# EAGLE board shield (EAGLE 7.7.0)
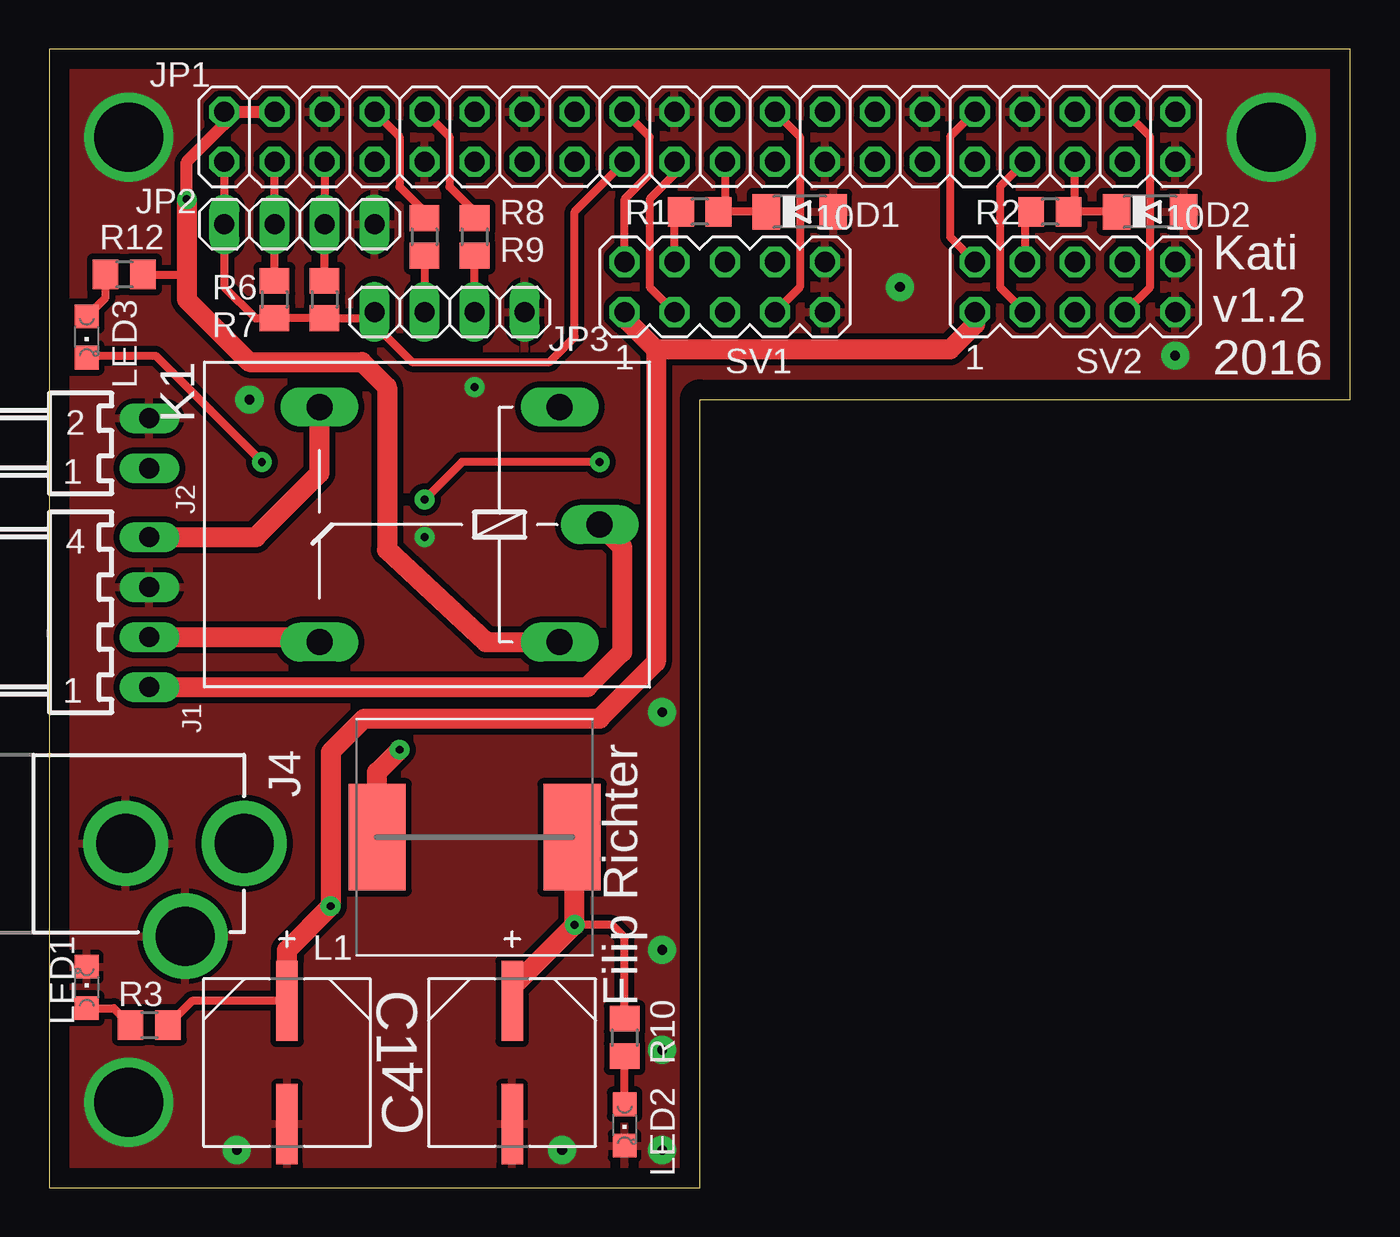
[diagram p0: board, top side]
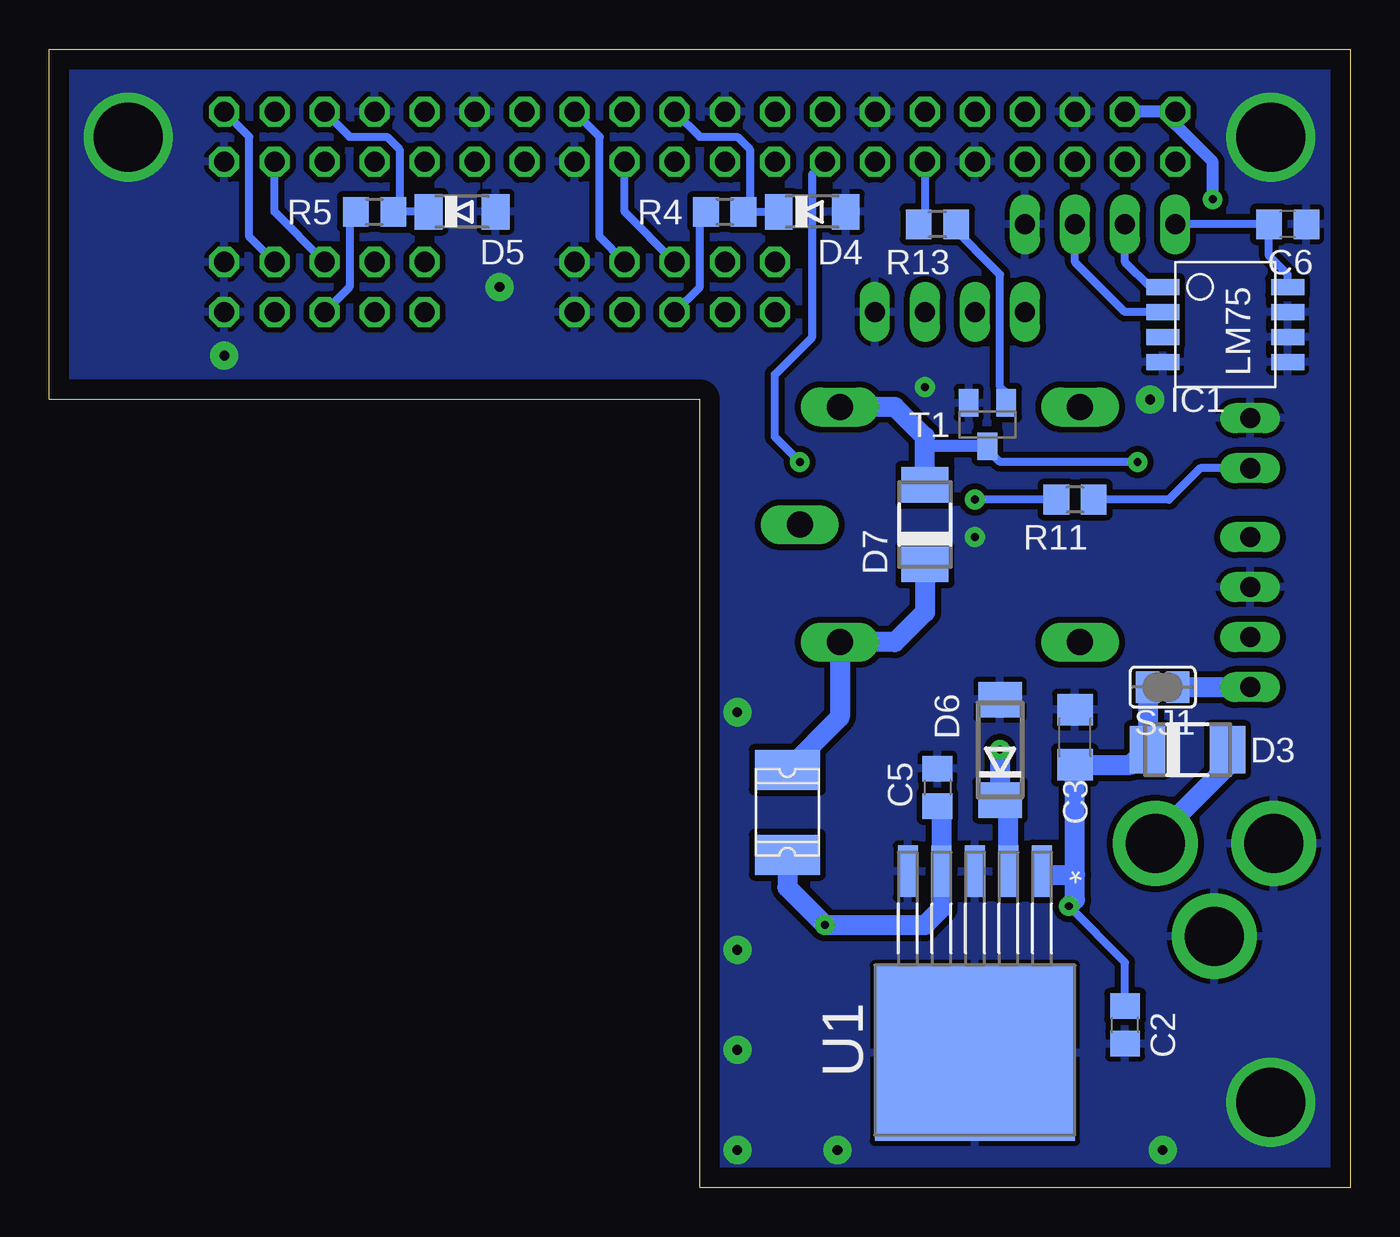
[diagram p1: board, bottom side, seen from below]

Size 66.04 x 57.78 mm. Coordinates in mm from the lower left corner, seen from the top.
Outline: 0,0 33.02,0 33.02,40.01 66.04,40.01 66.04,57.78 0,57.78 0,0
Copper layers (1*16): Top 0.018mm / dielectric 1.5mm / Bottom 0.018mm
Design rules "Pragoboard *": minimum track width 0.15mm, minimum drill 0.3mm, track to track 0.15mm, track to pad 0.15mm, pad to pad 0.15mm, via to via 0.15mm, smd to smd 0.15mm, copper to edge 40mil, drill to drill 8mil, minimum pad ring 10mil, minimum via ring 8mil, stop-mask expansion 4mil, vias tented up to drill 0.5mm, thermal gap 10mil

## Footprints (pad centres in the part's own frame; a part is rotated, then mirrored left to right if it is on the bottom)
CAPAE830X1050N = smd 4.064 x 1.092: 1 -3.124,0; 2 3.124,0
C0805 = smd 1.3 x 1.5: 1 -0.95,0; 2 0.95,0
C1206 = smd 1.6 x 1.8: 1 -1.4,0; 2 1.4,0
MINIMELF = smd 1.4 x 1.8: A 1.7,0; C -1.7,0
DO-214AC = smd 1.8 x 2.4: A 2.025,0; C -2.025,0
DO214AA = smd 1.8 x 2.2: A 2.55,0; C -2.55,0
1812L = smd 2.03 x 3.3: P$1 -2.16,0; P$2 2.16,0
SO8_LM75 = smd 0.813 x 1.676: 1 -1.27,-3.175; 2 0,-3.175; 3 1.27,-3.175; 4 2.54,-3.175; 5 2.54,3.175; 6 1.27,3.175; 7 0,3.175; 8 -1.27,3.175
7395-04 = drill 1.016 long: 1 3.81,0; 2 1.27,0; 3 -1.27,0; 4 -3.81,0
7395-02 = drill 1.016 long: 1 1.27,0; 2 -1.27,0
POWER_JACK_PTH = drill 2.997 pad 4.318: GND 0,7.7; GNDBREAK 4.7,10.7; PWR 0,13.7
2X20 = drill 1.016 octagon: 1 -24.13,-1.27; 2 -24.13,1.27; 3 -21.59,-1.27; 4 -21.59,1.27; 5 -19.05,-1.27; 6 -19.05,1.27; 7 -16.51,-1.27; 8 -16.51,1.27; 9 -13.97,-1.27; 10 -13.97,1.27; 11 -11.43,-1.27; 12 -11.43,1.27; 13 -8.89,-1.27; 14 -8.89,1.27; 15 -6.35,-1.27; 16 -6.35,1.27; 17 -3.81,-1.27; 18 -3.81,1.27; 19 -1.27,-1.27; 20 -1.27,1.27; 21 1.27,-1.27; 22 1.27,1.27; 23 3.81,-1.27; 24 3.81,1.27; 25 6.35,-1.27; 26 6.35,1.27; 27 8.89,-1.27; 28 8.89,1.27; 29 11.43,-1.27; 30 11.43,1.27; 31 13.97,-1.27; 32 13.97,1.27; 33 16.51,-1.27; 34 16.51,1.27; 35 19.05,-1.27; 36 19.05,1.27; 37 21.59,-1.27; 38 21.59,1.27; 39 24.13,-1.27; 40 24.13,1.27
1X04 = drill 1.016 long: 1 -3.81,0; 2 -1.27,0; 3 1.27,0; 4 3.81,0
G5LE = drill 1.321 long: 1 -7.493,-5.969; 2 -7.493,5.969; O 4.699,5.969; P -9.525,0; S 4.699,-5.969
WE-PD_1260/1245/1280/1210 = smd 2.9 x 5.4: 1 -4.95,0; 2 4.95,0
CHIPLED_0805 = smd 1.2 x 1.2: A 0,-1.05; C 0,1.05
R0805 = smd 1.3 x 1.5: 1 -0.95,0; 2 0.95,0
SJ = smd 1.168 x 1.6: 1 -0.762,0; 2 0.762,0
MA05-2 = drill 1.016 octagon: 1 -5.08,-1.27; 2 -5.08,1.27; 3 -2.54,-1.27; 4 -2.54,1.27; 5 0,-1.27; 6 0,1.27; 7 2.54,-1.27; 8 2.54,1.27; 9 5.08,-1.27; 10 5.08,1.27
SOT23-BEC = smd 1 x 1.4: B -0.95,-1.1; C 0,1.1; E 0.95,-1.1
TO170P1435X465-6N = smd 1.016 x 2.616: 1 -3.404,-9.068; 2 -1.702,-9.068; 3 0,-9.068; 4 1.702,-9.068; 5 3.404,-9.068 | smd 10.16 x 8.941: 6 0,0.152

## Placement (x,y rotation side)
C1  220UF  [CAPAE830X1050N]  12.06,6.35 270 top
C2  100n  [C0805]  11.43,8.26 90 bottom
C3  2.2uF/100V  [C1206]  13.97,22.86 90 bottom
C4  220u  [CAPAE830X1050N]  23.5,6.35 270 top
C5  100n  [C0805]  20.95,20.32 270 bottom
C6  100n  [C0805]  3.17,48.9 180 bottom
D1  BZV55C3.0SMD  [MINIMELF]  38.1,49.53 0 top
D2  BZV55C3.0SMD  [MINIMELF]  55.88,49.53 0 top
D3  1N4007 DO-214AC  [DO-214AC]  8.26,22.23 0 bottom
D4  BZV55C3.0SMD  [MINIMELF]  27.3,49.53 0 bottom
D5  BZV55C3.0SMD  [MINIMELF]  45.09,49.53 0 bottom
D6  SSB44-E3/52T  [DO214AA]  17.78,22.23 90 bottom
D7  1N4007 DO-214AC  [DO-214AC]  21.59,33.66 90 bottom
F1  PPTC1812SMD110/16V  [1812L]  28.57,19.05 90 bottom
IC1  LM75  [SO8_LM75]  6.35,44.45 270 bottom
J1  22-05-7048-04  [7395-04]  5.08,29.21 270 top
J2  22-05-7028-02  [7395-02]  5.08,37.78 270 top
J4  POWER_JACKPTH  [POWER_JACK_PTH]  -3.81,17.46 270 top
JP1  BL840GD  [2X20]  33.02,53.34 0 top
JP2  S1G04 2,54mm  [1X04]  12.7,48.9 0 top
JP3  S1G04 2,54mm  [1X04]  20.32,44.45 0 top
K1  G5L  [G5LE]  18.41,33.66 180 top
L1  SRR1260-680M  [WE-PD_1260/1245/1280/1210]  21.59,17.78 0 top
LED1  SML-LXT0805IW-TR  [CHIPLED_0805]  1.91,10.16 0 top
LED2  SML-LX0805SUGC-TR  [CHIPLED_0805]  29.21,3.17 180 top
LED3  SML-LX0805SUGC-TR  [CHIPLED_0805]  1.91,43.18 180 top
R1  1k7  [R0805]  33.02,49.53 180 top
R2  1k7  [R0805]  50.8,49.53 180 top
R3  5K6  [R0805]  5.08,8.26 0 top
R4  1k7  [R0805]  31.75,49.53 0 bottom
R5  1k7  [R0805]  49.53,49.53 0 bottom
R6  4k7  [R0805]  11.43,45.09 270 top
R7  4k7  [R0805]  13.97,45.09 270 top
R8  120R  [R0805]  19.05,48.26 270 top
R9  120R  [R0805]  21.59,48.26 270 top
R10  560R  [R0805]  29.21,7.62 270 top
R11  1k  [R0805]  13.97,34.92 180 bottom
R12  560R  [R0805]  3.81,46.35 180 top
R13  860R  [R0805]  20.95,48.9 180 bottom
SJ1  [SJ]  9.53,25.4 180 bottom
SV1  S2G10  [MA05-2]  34.29,45.72 0 top
SV2  S2G10  [MA05-2]  52.07,45.72 0 top
T1  BC817  [SOT23-BEC]  18.41,38.73 180 bottom
U1  LM2596S-5.0  [TO170P1435X465-6N]  19.05,6.99 180 bottom

## Library data of the parts
C1 C4 = Panasonic-EEEFK_EEEFP; MPN: EEE-FP1V221AP; OC_FARNELL: 1539514; OC_NEWARK: 94M7043; PACKAGE: CASE-F; SUPPLIER: PANASONIC; TOLERANCE: ±20 %; VOLTAGERATING: 35V
C2 C3 C5 C6 R1-R13 = rcl
D1-D7 = diode
F1 = ptc-littlefuse
IC1 = lm75
J1 = con-molex; OC_FARNELL: unknown; OC_NEWARK: unknown
J2 = con-molex; OC_FARNELL: 9731601; OC_NEWARK: unknown
J4 = SparkFun-Connectors; PROD_ID: CONN-08197
JP1-JP3 = pinhead
K1 = relay; OC_FARNELL: unknown; OC_NEWARK: unknown
L1 = WE-PD; MPN: 7447709680; OC_FARNELL: 1635947; OC_NEWARK: 08P2779; PACKAGE: 1210; SUPPLIER: Wuerth Elektronik
LED1-LED3 = led
SJ1 = jumper
SV1 SV2 = con-lstb; OC_FARNELL: unknown; OC_NEWARK: unknown
T1 = transistor
U1 = mylib; MPN: LM2596S-50; OC_FARNELL: 1214546; OC_NEWARK: 41K3844; PACKAGE: TO-263-5; SUPPLIER: National

## Nets
+3V3: C6.2 IC1.8 JP1.1 JP1.17 JP2.1 JP3.1 R6.2 R7.2
+5V: D7.C F1.P$2 JP1.2 JP1.4 K1.2 R12.1
+24V: C1.1 C2.2 C3.1 D3.C R3.2 SJ1.2 SV1.1 SV2.1 U1.1
C: J1.1 K1.P SJ1.1
GND: C1.2 C2.1 C3.2 C4.2 C5.1 C6.1 D1.A D2.A D4.A D5.A D6.A IC1.4 IC1.5 IC1.6 IC1.7 J1.3 J2.2 J4.GND J4.GNDBREAK JP1.6 JP1.9 JP1.14 JP1.20 JP1.25 JP1.30 JP1.34 JP1.39 JP2.4 JP3.4 LED1.C LED2.C SV1.9 SV1.10 SV2.9 SV2.10 T1.E U1.3 U1.5 U1.6
I-BEEP: JP1.18 SV1.2
I-D0: R1.2 SV1.4
I-D0-3V3: D1.C JP1.21 R1.1
I-D1: R4.1 SV1.5
I-D1-3V3: D4.C JP1.22 R4.2
I-GLED: JP1.23 SV1.6
I-HOLD: JP1.19 SV1.3
I-RLED: JP1.24 SV1.7
I-TMP: JP1.26 SV1.8
LED: LED3.A R12.2
LOCK: JP1.11 R13.2
LOCK_T1_R: R13.1 T1.B
N$1: C4.1 C5.2 F1.P$1 L1.2 R10.1 U1.4
N$2: J2.1 R11.1
N$3: JP3.2 R8.2
N$4: LED2.A R10.2
N$6: JP3.3 R9.2
N$23: LED1.A R3.1
N$31: D6.C L1.1 U1.2
NC: J1.2 K1.O
NO: J1.4 K1.S
O-BEEP: JP1.32 SV2.2
O-D0: R2.2 SV2.4
O-D0-3V3: D2.C JP1.35 R2.1
O-D1: R5.1 SV2.5
O-D1-3V3: D5.C JP1.36 R5.2
O-GLED: JP1.37 SV2.6
O-HOLD: JP1.33 SV2.3
O-RLED: JP1.38 SV2.7
O-TMP: JP1.40 SV2.8
RELAY_SW: D7.A K1.1 LED3.C T1.C
RXD: JP1.10 R9.1
SCL: IC1.2 JP1.5 JP2.3 R7.1
SDA: IC1.1 JP1.3 JP2.2 R6.1
TAMPER: JP1.15 R11.2
TXD: JP1.8 R8.1
UIN: D3.A J4.PWR

## Tracks (layer width: path | path; a pad name or v marks a point on that pad's centre or on a via)
+3V3
  Top 0.406: JP1.1 JP2.1 8.89,45.72 10.47,44.13 R6.2 R7.2 16.2,44.13 JP3.1 16.51,43.81 18.41,41.91 25.4,41.91 26.67,43.18 26.67,49.53 JP1.17
  Bottom 0.406: JP2.1 C6.2 4.12,47.3 3.17,46.35 IC1.8
+5V  (via drill 0.4 pad 1)
  Top 0.406: R12.1 6.99,46.35
  Top 0.61: v6.99,50.16 6.99,52.07 8.89,53.98 JP1.2 JP1.4
  Top 1.016: v6.99,50.16 6.99,46.35 6.99,45.09 10.16,41.91 15.88,41.91 17.14,40.64 17.14,32.38 22.16,27.69 K1.2
  Bottom 0.61: v6.99,50.16 6.99,52.07 8.89,53.98 JP1.2 JP1.4
  Bottom 1.016: D7.C 21.59,29.21 23.11,27.69 K1.2 25.91,23.88 F1.P$2
+24V  (via drill 0.4 pad 1)
  Top 0.406: C1.1 7.25,9.47 R3.2
  Top 1.016: 12.06,8.89 C1.1 12.06,12.06 v14.29,14.29 14.29,22.11 15.99,23.81 27.94,23.81 30.8,26.67 30.8,42.55 | 30.8,42.55 29.21,44.13 SV1.1 | SV2.1 46.99,43.81 45.72,42.55 30.8,42.55
  Bottom 0.406: C2.2 11.43,11.43 v14.29,14.29 | 10.36,22.23 D3.C
  Bottom 1.016: v14.29,14.29 13.97,14.61 13.97,15.88 | 13.97,15.88 C3.1 11.12,21.46 10.36,22.23 | U1.1 15.65,15.88 13.97,15.88 | SJ1.2 D3.C
C
  Top 1.016: J1.1 27.3,25.4 29.08,27.18 29.08,32.51 K1.P
  Bottom 1.016: SJ1.1 J1.1
GND  (via drill 0.4 pad 1, 0.5 pad 1.42, 3.5)
  other vias: 31.11,12.06 9.53,1.91 26.04,1.91 31.11,1.91 31.11,6.99 31.11,24.13 19.05,33.02 21.59,40.64 57.15,42.23 43.18,45.72 10.16,40.01 4.03,4.33 4.03,53.33 62.03,53.33
  pour Top (isolate 0.305): 0,57.78 66.04,57.78 66.04,40.01 33.02,40.01 33.02,0 0,0
  pour Bottom (isolate 0.305): 0,57.78 66.04,57.78 66.04,40.01 33.02,40.01 33.02,0 0,0
I-BEEP
  Top 0.406: SV1.2 29.21,50.16 30.48,51.44 30.48,53.34 JP1.18
I-D0
  Top 0.406: SV1.4 31.75,49.21 R1.2
I-D0-3V3
  Top 0.406: JP1.21 34.29,49.85 R1.1 D1.C
I-D1
  Bottom 0.406: SV1.5 33.02,45.72 33.02,49.22 R4.1
I-D1-3V3
  Bottom 0.406: JP1.22 33.02,53.34 31.11,53.34 30.48,52.7 30.48,49.84 R4.2 D4.C
I-GLED
  Bottom 0.406: SV1.6 36.83,49.53 JP1.23
I-HOLD
  Top 0.406: JP1.19 31.75,51.44 30.48,50.16 30.48,45.72 SV1.3
I-RLED
  Top 0.406: JP1.24 38.1,53.34 38.1,45.72 SV1.7
I-TMP
  Bottom 0.406: SV1.8 38.1,48.26 38.1,53.34 JP1.26
LED
  Top 0.406: LED3.A 2.86,45.19 R12.2
LOCK
  Bottom 0.406: JP1.11 21.59,49.21 R13.2
LOCK_T1_R
  Bottom 0.406: T1.B 17.46,40.33 17.78,40.64 17.78,46.35 20.32,48.9 R13.1
N$1  (via drill 0.4 pad 1)
  Top 0.406: R10.1 29.21,12.7 28.57,13.34 v26.67,13.34
  Top 1.016: C4.1 23.5,10.16 v26.67,13.34 26.67,17.65 L1.2
  Bottom 1.016: C5.2 20.75,19.37 U1.4 20.75,14.17 21.59,13.34 v26.67,13.34 28.57,15.24 F1.P$1
N$2
  Bottom 0.406: J2.1 7.62,36.51 9.21,34.92 R11.1
N$3
  Top 0.406: R8.2 JP3.2
N$4
  Top 0.406: LED2.A R10.2
N$6
  Top 0.406: JP3.3 R9.2
N$23
  Top 0.406: LED1.A 3.27,9.11 R3.1
N$31  (via drill 0.4 pad 1)
  Top 1.016: L1.1 16.64,21.09 v17.78,22.23
  Bottom 1.016: U1.2 17.35,19.24 D6.C v17.78,22.23
NC
  Top 1.016: J1.2 13.34,27.94 K1.O
NO
  Top 1.016: J1.4 10.48,33.02 13.72,36.26 K1.S
O-BEEP
  Top 0.406: JP1.32 45.72,53.34 45.72,48.26 SV2.2
O-D0
  Top 0.406: R2.2 49.53,49.53 SV2.4
O-D0-3V3
  Top 0.406: JP1.35 52.07,49.53 R2.1 D2.C
O-D1
  Bottom 0.406: SV2.5 50.8,45.72 50.8,48.9 50.48,49.21 R5.1
O-D1-3V3
  Bottom 0.406: D5.C R5.2 48.26,49.84 48.26,52.7 48.9,53.34 50.8,53.34 JP1.36
O-GLED
  Bottom 0.406: SV2.6 54.61,49.53 JP1.37
O-HOLD
  Top 0.406: JP1.33 48.26,50.8 48.26,45.72 SV2.3
O-RLED
  Top 0.406: SV2.7 55.88,45.72 55.88,53.34 JP1.38
O-TMP
  Bottom 0.406: SV2.8 55.88,48.26 55.88,53.34 JP1.40
RELAY_SW  (via drill 0.4 pad 1)
  Top 0.406: v10.79,36.83 5.4,42.23 1.49,42.23 LED3.C
  Bottom 0.406: v10.79,36.83 17.78,36.83 18.25,37.3 18.25,37.47 T1.C
  Bottom 0.61: T1.C 21.42,37.63 21.59,37.47
  Bottom 1.016: D7.A 21.59,37.47 21.59,38.1 23.11,39.62 K1.1
RXD
  Top 0.406: JP1.10 20.32,53.34 20.32,50.8 21.59,49.53 R9.1
SCL
  Top 0.406: JP1.5 JP2.3 R7.1
  Bottom 0.406: IC1.2 11.43,44.45 13.97,46.99 JP2.3
SDA
  Top 0.406: JP1.3 JP2.2 R6.1
  Bottom 0.406: IC1.1 10.16,45.72 11.43,46.99 JP2.2
TAMPER  (via drill 0.4 pad 1)
  Top 0.406: v27.94,36.83 20.95,36.83 v19.05,34.92
  Bottom 0.406: R11.2 v19.05,34.92 | v27.94,36.83 29.21,38.1 29.21,41.27 27.3,43.18 27.3,51.44 JP1.15
TXD
  Top 0.406: JP1.8 17.78,53.34 17.78,50.8 19.05,49.53 R8.1
UIN
  Bottom 1.016: 6.35,21.91 6.35,22.74 D3.A 6.35,22.11 6.35,21.27 9.89,17.73 J4.PWR

## Text on the board
tNames: Kati / v1.2 / 2016 | Filip Richter